# Altium PCB CMV.PcbDoc (part 2 of 2)
Units mm, origin at the board's own origin, x right, y up, seen from the top; angles counter-clockwise.
Board outline 97.43 x 161.7 mm, 4 copper layers (LVDS, GND, POWER, CMOS), stack 0.735 mm thick; 59 components, 58 nets, 1207 pads, 70 vias.
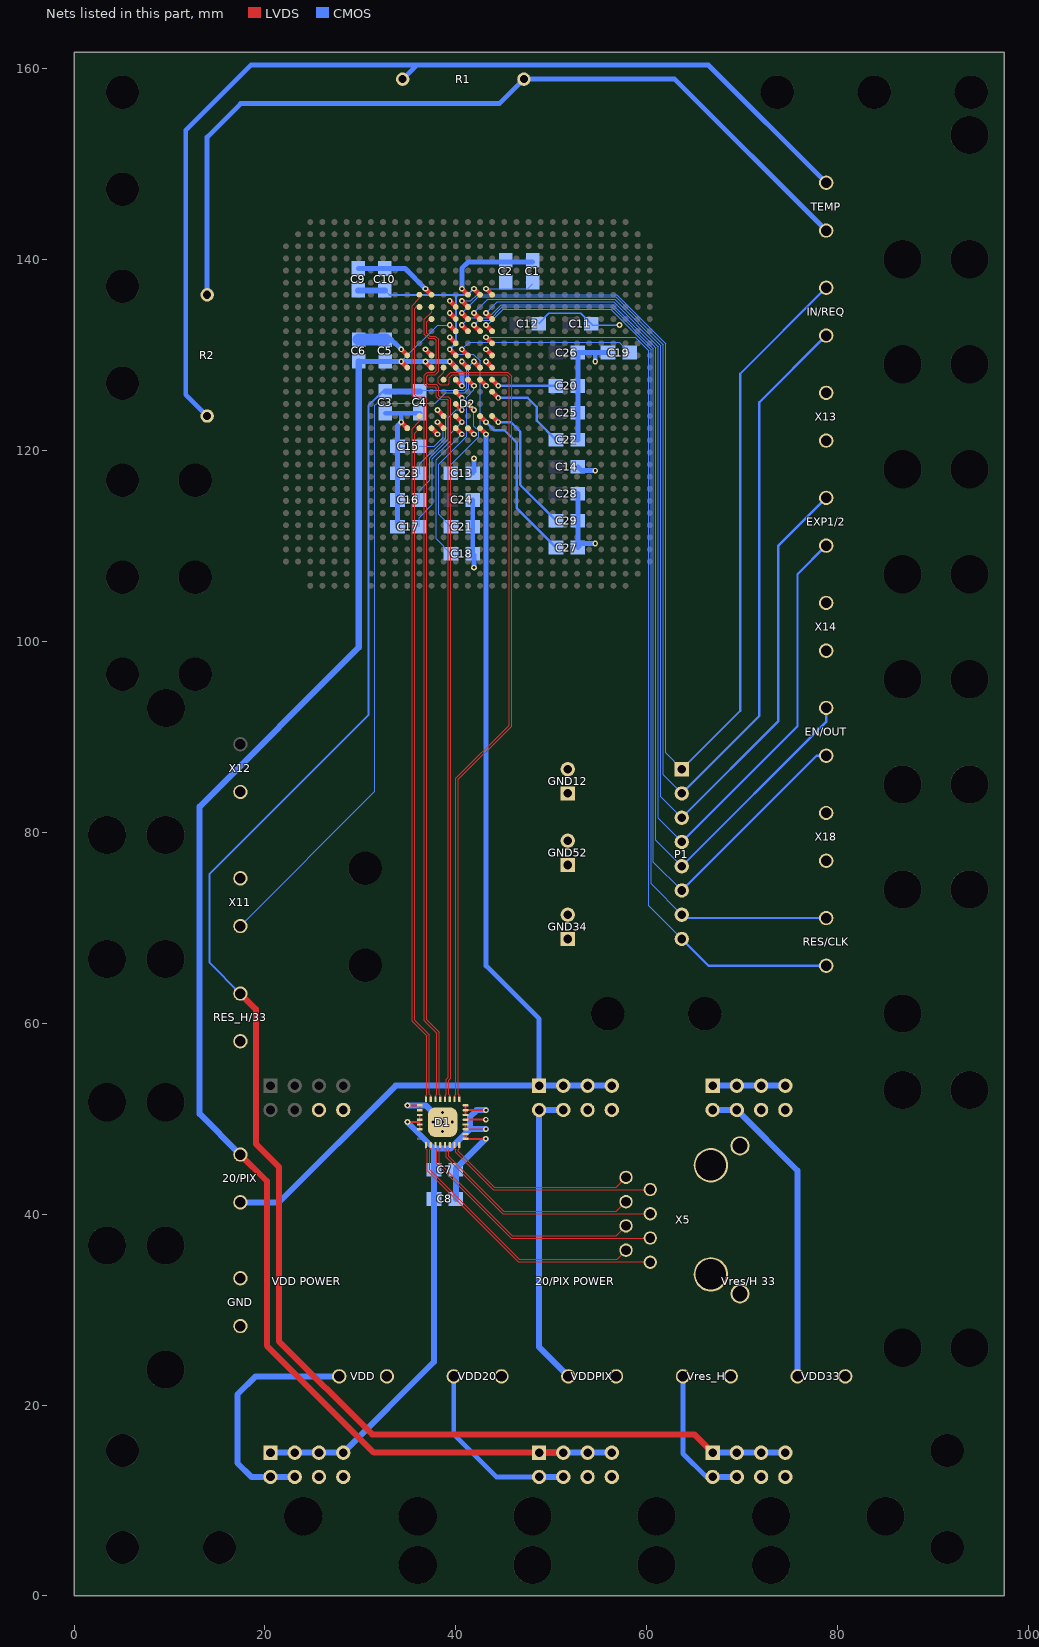
[diagram p4: the nets of this part, all layers, seen from the top]

## Via types
v1: diameter 0.6, hole 0.3, LVDS to CMOS, 70 vias

## Nets (pads, with @x,y where several pads share a name; then routed paths per layer and width w, separated by ;. In a path a pad name is that pad's centre, name@x,y a point inside that pad or via, vN(x,y) a via of type N, cw(c..) or ccw(c..) an arc to the next point about the centre after c; other vN are vias at no path point) (continued)
FRAME_REQ: D2.H16 IN/REQ.2 P1.1 | length 126.6
  LVDS w0.508: v1(40.615,135.635) D2.H16@41.25,135
  CMOS w0.127: v1(40.615,135.635) 41.554,135.635 42.213,136.294 56.822,136.294 61.951,131.165 61.951,88.289 P1.1@63.652,86.588
  CMOS w0.254: P1.1@63.652,86.588 69.77,92.705 69.77,128 IN/REQ.2@78.77,137
GND: "20/PIX POWER.1" "20/PIX POWER.4" "VDD POWER.1" "VDD POWER.4" "Vres/H 33.1" "Vres/H 33.4" C1.1 C2.1 C3.1 C4.1 C5.1 C6.1 C7.1 C8.1 C9.1 C10.1 C15.1 C16.1 C17.1 C18.1 C19.1 C20.1 C21.1 C22.1 C23.1 C24.1 C25.1 C26.1 C27.1 C28.1 C29.1 D1.1 D1.2 D1.5 D1.17 D1.18 D1.33 D2.G13 D2.G16 D2.J15 D2.L15 D2.M11 D2.M13 D2.N18 D2.P17 D2.R15 D2.V11 D2.V13 D2.V16 GND12.1 GND12.2 GND34.1 GND34.2 GND52.1 GND52.2 GND.1 GND.2 VDD20.2 VDD33.2 VDD.2 VDDPIX.2 Vres_H.2 X5.9 X5.10 X5.11 X5.12 X11.1 X12.1 X13.1 X13.2 X14.1 X14.2 X18.1 X18.2 | length 97.7
  LVDS w0.2: D1.18@36.208,50.881 D1.17@36.208,51.381 ; D1.1@41.008,47.881 D1.2@41.008,48.381
  LVDS w0.203: v1@34.925,51.383 v1(34.928,51.381) D1.17@36.208,51.381 ; D1.1@41.008,47.881 v1(43.127,47.881) ; D1.5@41.008,49.881 43.125,49.881 v1(43.129,49.885)
  LVDS w0.508: v1(34.265,122.935) D2.V11@34.9,122.3 ; v1(34.265,130.555) D2.M11@34.9,129.92 ; v1(36.805,130.555) D2.M13@37.44,129.92 ; v1(36.805,136.905) D2.G13@37.44,136.27 ; D2.V13@37.44,122.3 v1(38.075,121.665) ; v1(38.608,48.631) v1(38.608,49.631) v1(39.608,49.631) ; v1(39.345,131.825) D2.L15@39.98,131.19 ; v1(39.345,134.365) D2.J15@39.98,133.73 ; D2.R15@39.98,126.11 v1(40.615,125.475) ; v1(40.615,136.905) D2.G16@41.25,136.27 ; D2.V16@41.25,122.3 v1(41.885,121.665) ; D2.P17@42.52,127.38 v1(43.155,126.745) ; v1(43.155,129.285) D2.N18@43.79,128.65
  CMOS w0.508: C9.1@29.769,139.021 C10.1@32.563,139.021 34.689,139.021 v1(36.805,136.905) ; C3.1@32.614,123.867 34.341,123.867 ; C5.1@32.614,131.578 33.241,131.578 v1(34.265,130.555) ; C17.1@33.876,111.962 C16.1@33.876,114.782 C23.1@33.876,117.601 C15.1@33.876,120.42 33.876,122.547 v1(34.265,122.935) 34.265,123.791 34.341,123.867 ; C4.1@36.22,123.867 34.341,123.867 ; v1(40.615,136.905) 40.615,139.039 41.282,139.706 C1.1@48.031,139.706 ; C24.1@41.74,114.782 41.765,114.756 C18.1@41.765,109.143 41.885,109.023 v1(41.885,107.695) ; C28.1@52.763,115.442 C29.1@52.763,112.623 C27.1@52.763,109.803 53.195,110.235 v1(54.585,110.235) ; C22.1@52.763,121.081 C26.1@52.763,130.225 54.585,130.225 ; v1(54.585,129.285) 54.585,130.225 ; C19.1@55.923,130.225 54.585,130.225
  CMOS w0.635: v1(34.928,51.381) 36.858,51.381 v1(38.608,49.631) ; C8.1@39.987,41.579 C7.1@39.987,44.627 39.987,44.741 v1(43.127,47.881)
  CMOS w1.27: C6.1@29.82,131.578 C5.1@32.614,131.578
  other v1: 37.608,49.631 38.608,50.631
IN_VDD: "VDD POWER.2" VDD.1 | length 25.2
  CMOS w0.635: 23.114,12.47 20.574,12.47 18.567,12.47 17.12,13.918 17.12,21.107 19.012,23 VDD.1@27.77,23
IN_VDD20: "20/PIX POWER.2" VDD20.1 | length 19.4
  CMOS w0.508: VDD20.1@39.77,23 39.77,16.922 44.221,12.47 48.704,12.47
  CMOS w0.635: 48.704,12.47 51.244,12.47
IN_VDD33: "Vres/H 33.5" VDD33.1 | length 33.1
  CMOS w0.635: 66.878,50.901 69.418,50.901 75.77,44.549 VDD33.1@75.77,23
IN_VDDPIX: "20/PIX POWER.5" VDDPIX.1 | length 31.7
  CMOS w0.635: 51.244,50.901 48.704,50.901 48.704,26.065 VDDPIX.1@51.77,23
IN_VRES_H: "Vres/H 33.2" Vres_H.1 | length 14.7
  CMOS w0.508: Vres_H.1@63.77,23 63.77,14.919 66.218,12.47 66.878,12.47
  CMOS w0.635: 66.878,12.47 69.418,12.47
LVDS: C29.2 D2.U18 | length 14.5
  LVDS w0.508: D2.U18@43.79,123.57 v1(44.425,122.935)
  CMOS w0.254: v1(44.425,122.935) 45.745,122.935 46.736,121.944 46.736,116.364 C29.2@50.477,112.623
NetR1_1: R1.1 R2.1 TEMP.1 | length 107.9
  CMOS w0.508: R2.1@13.945,123.57 11.709,125.805 11.709,153.517 18.517,160.324 35.89,160.324 ; R1.1@34.417,158.851 35.89,160.324 ; TEMP.1@78.77,148 66.446,160.324 35.89,160.324
NetR1_2: R1.2 R2.2 TEMP.2 | length 90.4
  CMOS w0.508: R2.2@13.945,136.27 13.945,152.78 17.45,156.285 44.552,156.285 R1.2@47.117,158.851 62.919,158.851 TEMP.2@78.77,143
OUT1_N: D1.12 D2.H13 | length 87.3
  LVDS w0.127: D2.H13@37.44,135 37.44,134.467 36.678,133.705 36.678,132.155 37.135,131.698 37.742,131.698 37.948,131.492 37.948,128.35 37.732,128.134 36.997,128.134 36.685,127.823 36.685,126.912 36.971,126.625 37.813,126.625 37.94,126.498 37.94,125.606 38.19,125.355 39.083,125.355 39.218,125.221 39.218,54.33 38.981,54.093 38.981,52.522 38.858,52.399 D1.12@38.858,52.031
OUT1_P: D1.11 D2.J13 | length 86.1
  LVDS w0.127: D2.J13@37.44,133.73 37.236,133.73 36.932,133.425 36.932,132.26 37.24,131.952 37.847,131.952 38.202,131.597 38.202,128.245 37.837,127.88 37.102,127.88 36.939,127.718 36.939,127.017 37.076,126.879 37.918,126.879 38.194,126.604 38.194,125.711 38.296,125.609 39.188,125.609 39.472,125.326 39.472,54.224 39.235,53.988 39.235,52.522 39.358,52.399 D1.11@39.358,52.031
OUT1REP_N: D1.29 X5.5 | length 25.2
  LVDS w0.127: D1.29@38.858,47.231 38.858,46.862 38.981,46.739 38.981,45.952 44.904,40.029 56.9,40.029 X5.5@60.35,40.029
OUT1REP_P: D1.30 X5.6 | length 22.6
  LVDS w0.127: D1.30@39.358,47.231 39.358,46.862 39.235,46.739 39.235,46.057 45.009,40.283 56.794,40.283 X5.6@57.81,41.299
OUT9_N: D1.10 D2.N14 | length 88.2
  LVDS w0.127: D2.N14@38.71,128.65 38.71,128.168 38.125,127.584 38.125,127.075 38.354,126.847 39.167,126.847 39.319,126.999 39.319,127.583 39.624,127.888 45.336,127.888 45.568,127.657 45.568,91.21 39.98,85.622 39.98,52.521 39.858,52.399 D1.10@39.858,52.031
OUT9_P: D1.9 D2.P14 | length 85.7
  LVDS w0.127: D2.P14@38.71,127.38 39.472,128.142 45.442,128.142 45.822,127.762 45.822,91.105 40.234,85.517 40.234,52.524 40.358,52.399 D1.9@40.358,52.031
OUT9REP_N: D1.31 X5.7 | length 22.8
  LVDS w0.127: D1.31@39.858,47.231 39.858,46.862 39.981,46.739 39.981,46.477 43.889,42.569 X5.7@60.35,42.569
OUT9REP_P: D1.32 X5.8 | length 20.3
  LVDS w0.127: D1.32@40.358,47.231 40.358,46.862 40.235,46.739 40.235,46.583 43.994,42.823 56.794,42.823 X5.8@57.81,43.839
OUTCLK_N: D1.16 D2.U12 | length 72.5
  LVDS w0.127: D2.U12@36.17,123.57 36.17,123.012 35.408,122.25 35.408,60.193 36.955,58.646 36.955,52.496 36.858,52.399 D1.16@36.858,52.031
OUTCLK_P: D1.15 D2.V12 | length 71.2
  LVDS w0.127: D2.V12@36.17,122.3 35.662,121.792 35.662,60.299 37.135,58.825 37.209,58.751 37.209,52.553 37.358,52.405 D1.15@37.358,52.031
OUTCLKREP_N: D1.25 X5.1 | length 30.1
  LVDS w0.127: D1.25@36.858,47.231 36.858,46.862 36.981,46.739 36.981,44.552 46.507,35.026 60.274,35.026 X5.1@60.35,34.949
OUTCLKREP_P: D1.26 X5.2 | length 27.9
  LVDS w0.127: D1.26@37.358,47.231 37.358,46.862 37.235,46.739 37.235,44.657 46.613,35.28 56.871,35.28 X5.2@57.81,36.219 X5.2@58.128,35.902
OUTCTR_N: D1.14 D2.G12 | length 86.2
  LVDS w0.127: D2.G12@36.17,136.27 36.17,135.889 35.408,135.127 35.408,125.675 35.742,125.34 36.558,125.34 36.678,125.221 36.678,60.244 37.981,58.941 37.981,52.522 37.858,52.399 D1.14@37.858,52.031
OUTCTR_P: D1.13 D2.H12 | length 85
  LVDS w0.127: D2.H12@36.17,135 35.865,135 35.662,134.797 35.662,125.78 35.847,125.594 36.663,125.594 36.932,125.326 36.932,60.349 38.235,59.046 38.235,52.522 38.358,52.399 D1.13@38.358,52.031
OUTCTRREP_N: D1.27 X5.3 | length 27.6
  LVDS w0.127: D1.27@37.858,47.231 37.858,46.862 37.981,46.739 37.981,45.284 45.775,37.489 X5.3@60.35,37.489
OUTCTRREP_P: D1.28 X5.4 | length 25.1
  LVDS w0.127: D1.28@38.358,47.231 38.358,46.862 38.235,46.739 38.235,45.389 45.88,37.743 56.794,37.743 X5.4@57.81,38.759
RAMP: C13.2 D2.T16 | length 8.9
  LVDS w0.508: D2.T16@41.25,124.84 v1(41.885,124.205)
  CMOS w0.127: C13.2@39.454,117.601 39.454,118.472 42.375,121.393 42.375,122.038 41.885,122.529 v1(41.885,124.205)
REF_ADC: C15.2 D2.V14 | length 5.6
  LVDS w0.508: v1(38.075,122.935) D2.V14@38.71,122.3
  CMOS w0.127: C15.2@36.162,120.42 37.715,120.42 38.659,121.364 38.659,122.351 v1(38.075,122.935)
SG_ADC: C16.2 D2.T15 | length 12.5
  LVDS w0.508: D2.T15@39.98,124.84 v1(40.615,124.205)
  CMOS w0.127: C16.2@36.162,114.782 36.162,115.765 37.262,116.864 37.262,119.227 39.192,121.157 39.192,123.367 40.03,124.205 v1(40.615,124.205)
SPI_CLK: D2.K18 P1.7 RES/CLK.2 | length 96.4
  LVDS w0.508: v1(43.155,133.095) D2.K18@43.79,132.46
  CMOS w0.127: v1(43.155,133.095) 43.297,133.095 44.946,134.744 56.216,134.744 60.427,130.533 60.427,74.573 P1.7@63.652,71.348
  CMOS w0.254: P1.7@63.652,71.348 64,71 RES/CLK.2@78.77,71
SPI_EN: D2.K17 EN/OUT.1 P1.6 | length 101.2
  LVDS w0.508: v1(41.885,133.095) D2.K17@42.52,132.46
  CMOS w0.127: v1(41.885,133.095) 42.41,133.62 43.463,133.62 44.841,134.998 56.321,134.998 60.681,130.639 60.681,76.859 P1.6@63.652,73.888
  CMOS w0.254: P1.6@63.652,73.888 77.765,88 EN/OUT.1@78.77,88
SPI_IN: D2.J16 IN/REQ.1 P1.2 | length 126.8
  LVDS w0.508: v1(40.615,134.365) D2.J16@41.25,133.73
  CMOS w0.127: v1(40.615,134.365) 40.644,134.365 42.318,136.04 56.716,136.04 61.697,131.059 61.697,86.003 P1.2@63.652,84.048
  CMOS w0.254: P1.2@63.652,84.048 71.77,92.165 71.77,125 IN/REQ.1@78.77,132
SPI_OUT: D2.K16 EN/OUT.2 P1.5 | length 102.3
  LVDS w0.508: v1(40.615,133.095) D2.K16@41.25,132.46
  CMOS w0.127: v1(40.615,133.095) 41.394,133.874 43.358,133.874 44.735,135.252 56.426,135.252 60.935,130.744 60.935,79.145 P1.5@63.652,76.428
  CMOS w0.254: P1.5@63.652,76.428 78.77,91.545 EN/OUT.2@78.77,93
SYS_RES_N: D2.L18 P1.8 RES/CLK.1 | length 97.8
  LVDS w0.508: v1(43.155,131.825) D2.L18@43.79,131.19
  CMOS w0.127: v1(43.155,131.825) 58.776,131.825 60.173,130.428 60.173,72.287 P1.8@63.652,68.808
  CMOS w0.254: P1.8@63.652,68.808 66.46,66 RES/CLK.1@78.77,66
T_EXP1: D2.J18 EXP1/2.1 P1.4 | length 111.6
  LVDS w0.508: v1(43.155,134.365) D2.J18@43.79,133.73
  CMOS w0.127: v1(43.155,134.365) 44.321,135.532 56.506,135.532 61.189,130.849 61.189,81.431 P1.4@63.652,78.968
  CMOS w0.254: P1.4@63.652,78.968 75.77,91.085 75.77,107 EXP1/2.1@78.77,110
T_EXP2: D2.J17 EXP1/2.2 P1.3 | length 113.2
  LVDS w0.508: v1(41.885,134.365) D2.J17@42.52,133.73
  CMOS w0.127: v1(41.885,134.365) 43.305,135.786 56.611,135.786 61.443,130.954 61.443,83.717 P1.3@63.652,81.508
  CMOS w0.254: P1.3@63.652,81.508 73.77,91.625 73.77,110 EXP1/2.2@78.77,115
TANA: D2.N17 X11.2 | length 74.9
  LVDS w0.508: v1(41.885,129.285) D2.N17@42.52,128.65
  CMOS w0.127: X11.2@17.424,70.158 31.521,84.255 31.521,124.688 31.75,124.916 37.821,124.916 38.905,126 40.923,126 41.359,126.437 41.359,128.759 v1(41.885,129.285)
VBGAP: C27.2 D2.U17 | length 17.7
  LVDS w0.508: D2.U17@42.52,123.57 v1(43.155,122.935)
  CMOS w0.254: v1(43.155,122.935) 44.018,122.071 45.11,122.071 46.355,120.827 46.355,113.925 C27.2@50.477,109.803
VDD: "VDD POWER.3" C7.2 C8.2 D1.3 D1.4 D1.6 D1.7 D1.8 D1.19 D1.20 D1.21 D1.22 | length 65.4
  LVDS w0.2: v1(34.925,49.631) 36.208,49.631 ; D1.22@36.208,48.881 36.208,49.631 ; D1.19@36.208,50.381 36.208,49.631 ; D1.4@41.008,49.381 D1.3@41.008,48.881 43.116,48.881 v1(43.129,48.894) ; D1.6@41.008,50.381 D1.7@41.008,50.881 ; D1.8@41.008,51.381 D1.7@41.008,50.881 ; v1(43.129,50.875) 43.124,50.881 D1.7@41.008,50.881
  CMOS w0.635: 20.574,15.01 23.114,15.01 25.654,15.01 28.194,15.01 37.701,24.517 C8.2@37.701,41.579 C7.2@37.701,44.627 37.701,46.855 ; v1(34.925,49.631) 37.701,46.855 ; v1(43.129,48.894) 41.453,48.894 ; v1(43.129,50.875) 42.164,50.875 41.453,50.164 41.453,48.894 ; 37.701,46.855 39.413,46.855 41.453,48.894
VDD20: 20/PIX.1 "20/PIX POWER.3" C5.2 C6.2 D2.K15 D2.N11 D2.N13 D2.N15 D2.P15 | length 179.9
  LVDS w0.508: v1(34.265,129.285) D2.N11@34.9,128.65 ; v1(36.805,129.285) D2.N13@37.44,128.65 ; v1(39.345,129.285) D2.N15@39.98,128.65 ; v1(39.345,133.095) D2.K15@39.98,132.46 ; D2.P15@39.98,127.38 v1(40.615,126.745)
  LVDS w0.635: 20/PIX.1@17.424,46.227 20.193,43.458 20.193,26.213 31.395,15.01 51.244,15.01
  CMOS w0.127: v1(34.265,129.285) 38.075,133.095 v1(39.345,133.095)
  CMOS w0.508: C6.2@29.82,129.292 29.827,129.285 v1(34.265,129.285) v1(36.805,129.285) v1(39.345,129.285) 40.615,128.015 v1(40.615,126.745)
  CMOS w0.635: 20/PIX.1@17.424,46.227 13.157,50.494 13.157,82.676 29.82,99.338 C6.2@29.82,129.292 ; 48.704,15.01 51.244,15.01 53.785,15.01 56.325,15.01
VDD33: "Vres/H 33.6" C1.2 C2.2 C11.1 C12.1 C13.1 C14.1 D2.G18 D2.H15 D2.M18 RES_H/33.2 | length 28.4
  LVDS w0.508: v1(39.345,135.635) D2.H15@39.98,135 ; v1(43.155,130.555) D2.M18@43.79,129.92 ; v1(43.155,136.905) D2.G18@43.79,136.27
  CMOS w0.127: v1(43.155,136.905) 47.516,136.905 C1.2@48.031,137.42
  CMOS w0.152: C12.1@48.648,133.247 49.741,134.34 53.093,134.34 C11.1@54.186,133.247 54.338,133.095 v1(57.125,133.095)
  CMOS w0.508: C13.1@41.74,117.601 41.885,117.746 v1(41.885,119.125) ; C14.1@52.763,118.261 53.17,117.855 v1(54.585,117.855)
  CMOS w0.635: 66.878,53.441 69.418,53.441 71.958,53.441 74.498,53.441
VDDPIX: 20/PIX.2 "20/PIX POWER.6" C9.2 C10.2 D2.G17 D2.M15 D2.V17 | length 147.4
  LVDS w0.508: v1(39.345,130.555) D2.M15@39.98,129.92 ; v1(41.885,136.905) D2.G17@42.52,136.27 ; D2.V17@42.52,122.3 v1(43.155,121.665)
  CMOS w0.127: C10.2@32.563,136.735 C10.2@33.027,136.27 ; v1(39.345,130.555) 39.853,130.047 41.816,130.047 42.52,129.344 42.52,122.3 v1(43.155,121.665)
  CMOS w0.203: C10.2@33.027,136.27 40.005,136.27 ; v1(39.345,130.555) 40.005,131.215 40.005,136.27 ; v1(41.885,136.905) 41.25,136.27 40.005,136.27
  CMOS w0.508: v1(43.155,121.665) 43.155,65.988 48.704,60.438 48.704,53.441
  CMOS w0.635: 20/PIX.2@17.424,41.227 21.467,41.227 33.68,53.441 48.704,53.441 51.244,53.441 53.785,53.441 56.325,53.441 ; C9.2@29.769,136.735 C10.2@32.563,136.735
VPCH_H: C19.2 D2.M16 | length 19.3
  LVDS w0.508: v1(40.615,130.555) D2.M16@41.25,129.92
  CMOS w0.127: v1(40.615,130.555) 41.377,131.317 57.117,131.317 C19.2@58.209,130.225
VRAMP1: C17.2 D2.U15 | length 13.7
  LVDS w0.508: D2.U15@39.98,123.57 v1(40.615,122.935)
  CMOS w0.127: C17.2@36.162,111.962 36.162,112.945 37.541,114.324 37.541,119.1 39.446,121.005 39.446,121.767 v1(40.615,122.935)
VRAMP2: C18.2 D2.V15 | length 15.2
  LVDS w0.508: D2.V15@39.98,122.3 v1(40.615,121.665)
  CMOS w0.127: C18.2@39.479,109.143 37.922,110.7 37.922,118.973 v1(40.615,121.665)
VREF: C23.2 D2.U14 | length 9.1
  LVDS w0.508: v1(38.075,124.205) D2.U14@38.71,123.57
  CMOS w0.127: C23.2@36.162,117.601 36.213,117.55 36.213,118.559 38.913,121.259 38.913,123.367 v1(38.075,124.205)
VRES_H: "Vres/H 33.3" C3.2 C4.2 D2.N16 RES_H/33.1 | length 180.1
  LVDS w0.508: v1(40.615,129.285) D2.N16@41.25,128.65
  LVDS w0.635: RES_H/33.1@17.424,63.093 19.05,61.467 19.05,47.346 21.488,44.907 21.488,26.645 31.217,16.916 64.972,16.916 66.878,15.01
  CMOS w0.127: C4.2@36.439,126.254 40.818,126.254 41.105,126.542 41.105,128.794 v1(40.615,129.285)
  CMOS w0.203: RES_H/33.1@17.424,63.093 14.199,66.318 14.199,75.615 30.836,92.252 30.836,124.637 C3.2@32.36,126.161
  CMOS w0.635: C3.2@32.614,126.153 C4.2@36.22,126.153 ; 66.878,15.01 69.418,15.01 71.958,15.01 74.498,15.01
VRES_L: C20.2 D2.P18 | length 6.9
  LVDS w0.508: D2.P18@43.79,127.38 v1(44.425,126.745)
  CMOS w0.254: v1(44.425,126.745) C20.2@50.452,126.745
VTF_L2: C21.2 D2.P16 | length 17.8
  LVDS w0.508: D2.P16@41.25,127.38 v1(41.885,126.745)
  CMOS w0.127: C21.2@39.479,111.962 38.176,113.265 38.176,118.515 41.123,121.462 41.123,125.543 41.885,126.305 v1(41.885,126.745)
VTF_L3: C22.2 D2.R18 | length 9.6
  LVDS w0.508: D2.R18@43.79,126.11 v1(44.425,125.475)
  CMOS w0.254: v1(44.425,125.475) 47.523,125.475 48.463,124.535 48.463,123.095 C22.2@50.477,121.081
pads on no net: "VDD POWER.5" "VDD POWER.6" D1.23 D1.24 D2.A3 D2.A4 D2.A5 D2.A6 D2.A7 D2.A8 D2.A9 D2.A10 D2.A11 D2.A12 D2.A13 D2.A14 D2.A15 D2.A16 D2.A17 D2.A18 D2.A19 D2.A20 D2.A21 D2.A22 D2.A23 D2.A24 D2.A25 D2.A26 D2.A27 D2.A28 D2.A29 D2.AA1 D2.AA2 D2.AA3 D2.AA4 D2.AA5 D2.AA6 D2.AA7 D2.AA8 D2.AA9 D2.AA10 D2.AA11 D2.AA12 D2.AA13 D2.AA14 D2.AA15 D2.AA16 D2.AA17 D2.AA18 D2.AA19 D2.AA20 D2.AA21 D2.AA22 D2.AA23 D2.AA24 D2.AA25 D2.AA26 D2.AA27 D2.AA28 D2.AA29 D2.AA30 D2.AA31 D2.AB1 D2.AB2 D2.AB3 D2.AB4 D2.AB5 D2.AB6 D2.AB7 D2.AB8 D2.AB9 D2.AB10 D2.AB11 D2.AB12 D2.AB13 D2.AB14 D2.AB15 D2.AB16 D2.AB17 D2.AB18 D2.AB19 D2.AB20 D2.AB21 D2.AB22 D2.AB23 D2.AB24 D2.AB25 D2.AB26 D2.AB27 D2.AB28 D2.AB29 D2.AB30 D2.AB31 D2.AC1 D2.AC2 D2.AC3 D2.AC4 D2.AC5 D2.AC6 D2.AC7 D2.AC8 D2.AC9 D2.AC10 D2.AC11 D2.AC12 D2.AC13 D2.AC14 D2.AC15 D2.AC16 D2.AC17 D2.AC18 D2.AC19 D2.AC20 D2.AC21 D2.AC22 D2.AC23 D2.AC24 D2.AC25 D2.AC26 D2.AC27 D2.AC28 D2.AC29 D2.AC30 D2.AC31 D2.AD1 D2.AD2 D2.AD3 D2.AD4 D2.AD5 D2.AD6 D2.AD7 D2.AD8 D2.AD9 D2.AD10 D2.AD11 D2.AD12 D2.AD13 D2.AD14 D2.AD15 D2.AD16 D2.AD17 D2.AD18 D2.AD19 D2.AD20 D2.AD21 D2.AD22 D2.AD23 D2.AD24 D2.AD26 D2.AD27 D2.AD28 D2.AD29 D2.AD30 D2.AD31 D2.AE1 D2.AE2 D2.AE3 D2.AE4 D2.AE5 D2.AE6 D2.AE7 D2.AE8 D2.AE9 D2.AE10 D2.AE11 D2.AE12 D2.AE13 D2.AE14 D2.AE15 D2.AE16 D2.AE17 D2.AE18 D2.AE19 D2.AE20 D2.AE21 D2.AE22 D2.AE23 D2.AE24 D2.AE26 D2.AE27 D2.AE28 D2.AE29 D2.AE30 D2.AE31 D2.AF1 D2.AF2 D2.AF3 D2.AF4 D2.AF5 D2.AF6 D2.AF7 D2.AF8 D2.AF9 D2.AF10 D2.AF11 D2.AF12 D2.AF13 D2.AF14 D2.AF15 D2.AF16 D2.AF17 D2.AF18 D2.AF19 D2.AF20 D2.AF21 D2.AF22 D2.AF23 D2.AF24 D2.AF25 D2.AF26 D2.AF27 D2.AF28 D2.AF29 D2.AF30 D2.AF31 D2.AG1 D2.AG2 D2.AG3 D2.AG4 D2.AG5 D2.AG6 D2.AG7 D2.AG8 D2.AG9 D2.AG10 D2.AG11 D2.AG12 D2.AG13 D2.AG14 D2.AG15 D2.AG16 D2.AG17 D2.AG18 D2.AG19 D2.AG20 D2.AG21 D2.AG22 D2.AG23 D2.AG24 D2.AG25 D2.AG26 D2.AG27 D2.AG28 D2.AG29 D2.AG30 D2.AG31 D2.AH1 D2.AH2 D2.AH3 D2.AH4 D2.AH5 D2.AH6 D2.AH7 D2.AH9 D2.AH10 D2.AH11 D2.AH12 D2.AH13 D2.AH14 D2.AH15 D2.AH16 D2.AH17 D2.AH18 D2.AH19 D2.AH20 D2.AH21 D2.AH22 D2.AH23 D2.AH24 D2.AH25 D2.AH26 D2.AH27 D2.AH28 D2.AH29 D2.AH30 D2.AH31 D2.AJ1 D2.AJ2 D2.AJ3 D2.AJ4 D2.AJ5 D2.AJ6 D2.AJ7 D2.AJ9 D2.AJ10 D2.AJ11 D2.AJ12 D2.AJ13 D2.AJ14 D2.AJ15 D2.AJ16 D2.AJ17 D2.AJ18 D2.AJ19 D2.AJ20 D2.AJ21 D2.AJ22 D2.AJ23 D2.AJ24 D2.AJ25 D2.AJ26 D2.AJ27 D2.AJ28 D2.AJ29 D2.AJ30 D2.AJ31 D2.AK3 D2.AK4 D2.AK5 D2.AK6 D2.AK7 D2.AK8 D2.AK9 D2.AK10 D2.AK11 D2.AK12 D2.AK13 D2.AK14 D2.AK15 D2.AK16 D2.AK17 D2.AK18 D2.AK19 D2.AK20 D2.AK21 D2.AK22 D2.AK23 D2.AK24 D2.AK25 D2.AK26 D2.AK27 D2.AK28 D2.AK29 D2.AK30 D2.AL3 D2.AL4 D2.AL5 D2.AL6 D2.AL7 D2.AL8 D2.AL9 D2.AL10 D2.AL11 D2.AL12 D2.AL13 D2.AL14 D2.AL15 D2.AL16 D2.AL17 D2.AL18 D2.AL19 D2.AL20 D2.AL21 D2.AL22 D2.AL23 D2.AL24 D2.AL25 D2.AL26 D2.AL27 D2.AL28 D2.AL29 D2.B2 D2.B3 D2.B4 D2.B5 D2.B6 D2.B7 D2.B8 D2.B9 D2.B10 D2.B11 D2.B12 D2.B13 D2.B14 D2.B15 D2.B16 D2.B17 D2.B18 D2.B19 D2.B20 D2.B21 D2.B22 D2.B23 D2.B24 D2.B25 D2.B26 D2.B27 D2.B28 D2.B29 D2.B30 D2.C1 D2.C2 D2.C3 D2.C4 D2.C5 D2.C6 D2.C7 D2.C8 D2.C9 D2.C10 D2.C11 D2.C12 D2.C13 D2.C14 D2.C15 D2.C16 D2.C17 D2.C18 D2.C19 D2.C20 D2.C21 D2.C22 D2.C23 D2.C24 D2.C25 D2.C26 D2.C27 D2.C28 D2.C29 D2.C30 D2.C31 D2.D1 D2.D2 D2.D3 D2.D4 D2.D5 D2.D6 D2.D7 D2.D8 D2.D9 D2.D10 D2.D11 D2.D12 D2.D13 D2.D14 D2.D15 D2.D16 D2.D17 D2.D18 D2.D19 D2.D20 D2.D21 D2.D22 D2.D23 D2.D24 D2.D25 D2.D26 D2.D27 D2.D28 D2.D29 D2.D30 D2.D31 D2.E1 D2.E2 D2.E3 D2.E4 D2.E5 D2.E6 D2.E7 D2.E8 D2.E9 D2.E10 D2.E11 D2.E12 D2.E13 D2.E14 D2.E15 D2.E16 D2.E17 D2.E18 D2.E19 D2.E20 D2.E21 D2.E22 D2.E23 D2.E24 D2.E25 D2.E26 D2.E27 D2.E28 D2.E29 D2.E30 D2.E31 D2.F1 D2.F2 D2.F3 D2.F4 D2.F5 D2.F6 D2.F7 D2.F8 D2.F9 D2.F10 D2.F11 D2.F12 D2.F13 D2.F14 D2.F15 D2.F16 D2.F17 D2.F18 D2.F19 D2.F20 D2.F21 D2.F22 D2.F23 D2.F24 D2.F25 D2.F26 D2.F27 D2.F28 D2.F29 D2.F30 D2.F31 D2.G1 D2.G2 D2.G3 D2.G4 D2.G5 D2.G6 D2.G7 D2.G8 D2.G9 D2.G10 D2.G11 D2.G14 D2.G19 D2.G20 D2.G21 D2.G22 D2.G23 D2.G24 D2.G25 D2.G26 D2.G27 D2.G28 D2.G29 D2.G30 D2.G31 D2.H1 D2.H2 D2.H3 D2.H4 D2.H5 D2.H6 D2.H7 D2.H8 D2.H9 D2.H10 D2.H11 D2.H14 D2.H17 D2.H18 D2.H19 D2.H20 D2.H21 D2.H22 D2.H23 D2.H24 D2.H25 D2.H26 D2.H27 D2.H28 D2.H29 D2.H30 D2.H31 D2.J1 D2.J2 D2.J3 D2.J4 D2.J5 D2.J6 D2.J7 D2.J8 D2.J9 D2.J10 D2.J11 D2.J12 D2.J14 D2.J19 D2.J20 D2.J21 D2.J22 D2.J23 D2.J24 D2.J25 D2.J26 D2.J27 D2.J28 D2.J29 D2.J30 D2.J31 D2.K1 D2.K2 D2.K3 D2.K4 D2.K5 D2.K6 D2.K7 D2.K8 D2.K9 D2.K10 D2.K11 D2.K12 D2.K13 D2.K14 D2.K19 D2.K20 D2.K21 D2.K22 D2.K23 D2.K24 D2.K25 D2.K26 D2.K27 D2.K28 D2.K29 D2.K30 D2.K31 D2.L1 D2.L2 D2.L3 D2.L4 D2.L5 D2.L6 D2.L7 D2.L9 D2.L10 D2.L11 D2.L12 D2.L13 D2.L14 D2.L19 D2.L20 D2.L21 D2.L22 D2.L23 D2.L24 D2.L25 D2.L26 D2.L27 D2.L28 D2.L29 D2.L30 D2.L31 D2.M1 D2.M2 D2.M3 D2.M4 D2.M5 D2.M6 D2.M7 D2.M9 D2.M10 D2.M12 D2.M14 D2.M19 D2.M20 D2.M21 D2.M22 D2.M23 D2.M24 D2.M25 D2.M26 D2.M27 D2.M28 D2.M29 D2.M30 D2.M31 D2.N1 D2.N2 D2.N3 D2.N4 D2.N5 D2.N6 D2.N7 D2.N8 D2.N9 D2.N10 D2.N12 D2.N19 D2.N20 D2.N21 D2.N22 D2.N23 D2.N25 D2.N26 D2.N27 D2.N28 D2.N29 D2.N30 D2.N31 D2.P1 D2.P2 D2.P3 D2.P4 D2.P5 D2.P6 D2.P7 D2.P8 D2.P9 D2.P10 D2.P11 D2.P12 D2.P13 D2.P19 D2.P20 D2.P21 D2.P22 D2.P23 D2.P25 D2.P26 D2.P27 D2.P28 D2.P29 D2.P30 D2.P31 D2.R1 D2.R2 D2.R3 D2.R4 D2.R5 D2.R6 D2.R7 D2.R8 D2.R9 D2.R10 D2.R11 D2.R12 D2.R13 D2.R14 D2.R19 D2.R20 D2.R21 D2.R22 D2.R23 D2.R24 D2.R25 D2.R26 D2.R27 D2.R28 D2.R29 D2.R30 D2.R31 D2.T1 D2.T2 D2.T3 D2.T4 D2.T5 D2.T6 D2.T7 D2.T8 D2.T9 D2.T10 D2.T11 D2.T12 D2.T13 D2.T14 D2.T19 D2.T20 D2.T21 D2.T22 D2.T23 D2.T24 D2.T25 D2.T26 D2.T27 D2.T28 D2.T29 D2.T30 D2.T31 D2.U1 D2.U2 D2.U3 D2.U4 D2.U5 D2.U6 D2.U7 D2.U8 D2.U9 D2.U10 D2.U11 D2.U13 D2.U16 D2.U19 D2.U20 D2.U21 D2.U22 D2.U23 D2.U24 D2.U25 D2.U26 D2.U27 D2.U28 D2.U29 D2.U30 D2.U31 D2.V1 D2.V2 D2.V3 D2.V4 D2.V5 D2.V6 D2.V7 D2.V8 D2.V9 D2.V10 D2.V18 D2.V19 D2.V20 D2.V21 D2.V22 D2.V23 D2.V24 D2.V25 D2.V26 D2.V27 D2.V28 D2.V29 D2.V30 D2.V31 D2.W1 D2.W2 D2.W3 D2.W4 D2.W5 D2.W6 D2.W7 D2.W8 D2.W9 D2.W10 D2.W11 D2.W12 D2.W13 D2.W14 D2.W15 D2.W16 D2.W17 D2.W18 D2.W19 D2.W20 D2.W21 D2.W22 D2.W23 D2.W24 D2.W25 D2.W26 D2.W27 D2.W28 D2.W29 D2.W30 D2.W31 D2.Y1 D2.Y2 D2.Y3 D2.Y4 D2.Y5 D2.Y6 D2.Y7 D2.Y8 D2.Y9 D2.Y10 D2.Y11 D2.Y12 D2.Y13 D2.Y14 D2.Y15 D2.Y16 D2.Y17 D2.Y18 D2.Y19 D2.Y20 D2.Y21 D2.Y22 D2.Y23 D2.Y24 D2.Y25 D2.Y26 D2.Y27 D2.Y28 D2.Y29 D2.Y30 D2.Y31

## Polygon pours and split planes (outlines as drawn)
GND on GND (split plane): 96.924,0.51 0.51,0.51 0.51,161.185 96.924,161.185
VDD33 on POWER (split plane): 96.924,0.51 0.51,0.51 0.51,161.185 96.924,161.185

## Keep-outs
Keep-Out Layer:
  the board outline again, w0.254

## Other copper
GND (plane layer: these items are gaps in the copper):
  pour cut-out: 39.345,130.555 39.345,129.285 40.615,129.285 40.615,131.825
  pour cut-out: 40.615,129.285 41.885,129.285 43.155,130.555 43.155,134.365 40.615,134.365
  pour cut-out: 41.885,125.475 41.885,124.205 43.155,124.205 43.155,122.935 44.425,122.935 44.425,125.475
  pour cut-out: 40.615,121.665 41.25,122.3 42.52,122.3 43.155,121.665 43.79,122.3 43.79,124.205 40.615,124.205
  pour cut-out: 36.17,52.196 36.17,46.989 41.123,46.989 41.123,52.196
POWER (plane layer: these items are gaps in the copper):
  pour cut-out: 40.615,126.745 40.615,121.665 44.425,121.665 44.425,126.745
  pour cut-out: 39.345,134.365 39.345,129.285 41.885,129.285 41.885,130.555 43.155,131.825 43.155,134.365
  pour cut-out: 32.766,54.457 32.766,45.567 44.907,45.567 44.907,54.457

## Silkscreen, mask and mechanical layers (free items; w line width, h text height)
Top Overlay:
  text "0.15mm" at 9.525,159.181 h1
  text "0.127mm" at 15.621,159.181 h1
  text "СТЯЖКА" at 94.234,144.018 h1.52 r90
  text "СТЯЖКА" at 87.224,131.673 h1.52 r90
  text "СТЯЖКА" at 94.31,120.7 h1.52 r90
  text "СТЯЖКА" at 87.351,109.727 h1.52 r90
  text "СТЯЖКА" at 94.259,98.805 h1.52 r90
  text "VPL CMV4000" at 31.826,91.21 h1.52
  text "СТЯЖКА" at 9.196,89.208 h1.52 r270
  text "СТЯЖКА" at 87.224,87.781 h1.52 r90
  text "REQ" at 58.777,86.207 h1
  text "GND" at 22.657,83.795 h1
  text "IN" at 59.943,83.717 h1
  text "EXP2" at 57.777,81.152 h1
  text "EXP1" at 58.11,78.612 h1
  text "СТЯЖКА" at 94.259,76.758 h1.52 r90
  text "OUT" at 58.777,76.072 h1
  text "СТЯЖКА" at 2.897,75.848 h1.52 r270
  text "GND" at 22.657,74.827 h1
  text "EN" at 59.776,73.481 h1
  text "CLK" at 58.777,70.992 h1
  text "RES" at 58.777,68.325 h1
  text "СТЯЖКА" at 87.249,64.617 h1.52 r90
  text "СТЯЖКА" at 9.196,61.929 h1.52 r270
  text "СТЯЖКА" at 2.795,47.171 h1.52 r270
  text "СТЯЖКА" at 87.257,36.854 h1.52 r90
  text "СТЯЖКА" at 94.257,36.854 h1.52 r90
  text "СТЯЖКА" at 9.145,32.744 h1.52 r270
  text "ВХОДНАЯ ГРУППА" at 30.886,31.115 h2
  text "СТЯЖКА" at 51.383,7.899 h1.52
  text "СТЯЖКА" at 27.177,7.798 h1.52
  text "СТЯЖКА" at 76.275,7.772 h1.52
  text "СТЯЖКА" at 63.88,2.769 h1.52
  text "СТЯЖКА" at 39.115,2.591 h1.52